# Altium PCB SD.PcbDoc
Units mm, origin at the board's own origin, x right, y up, seen from the top; angles counter-clockwise.
Board outline 23.37 x 34.8 mm, 2 copper layers (Top Layer, Bottom Layer); 9 components, 8 nets, 35 pads, 9 vias.
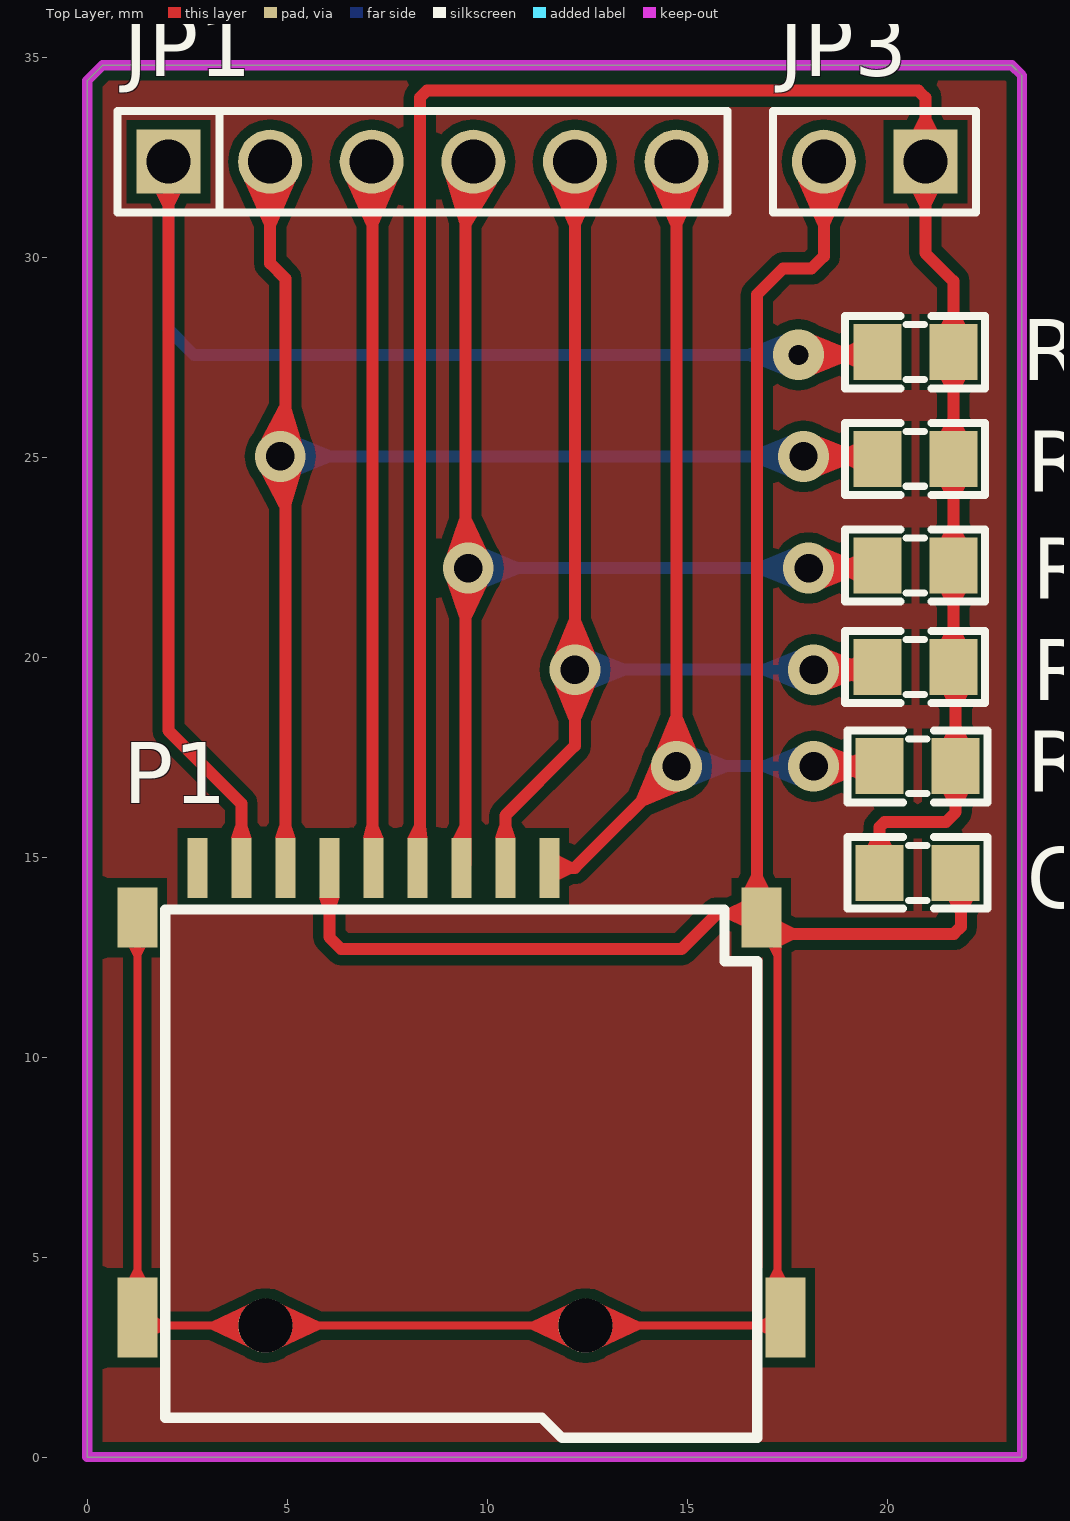
[diagram p0: Top Layer view]
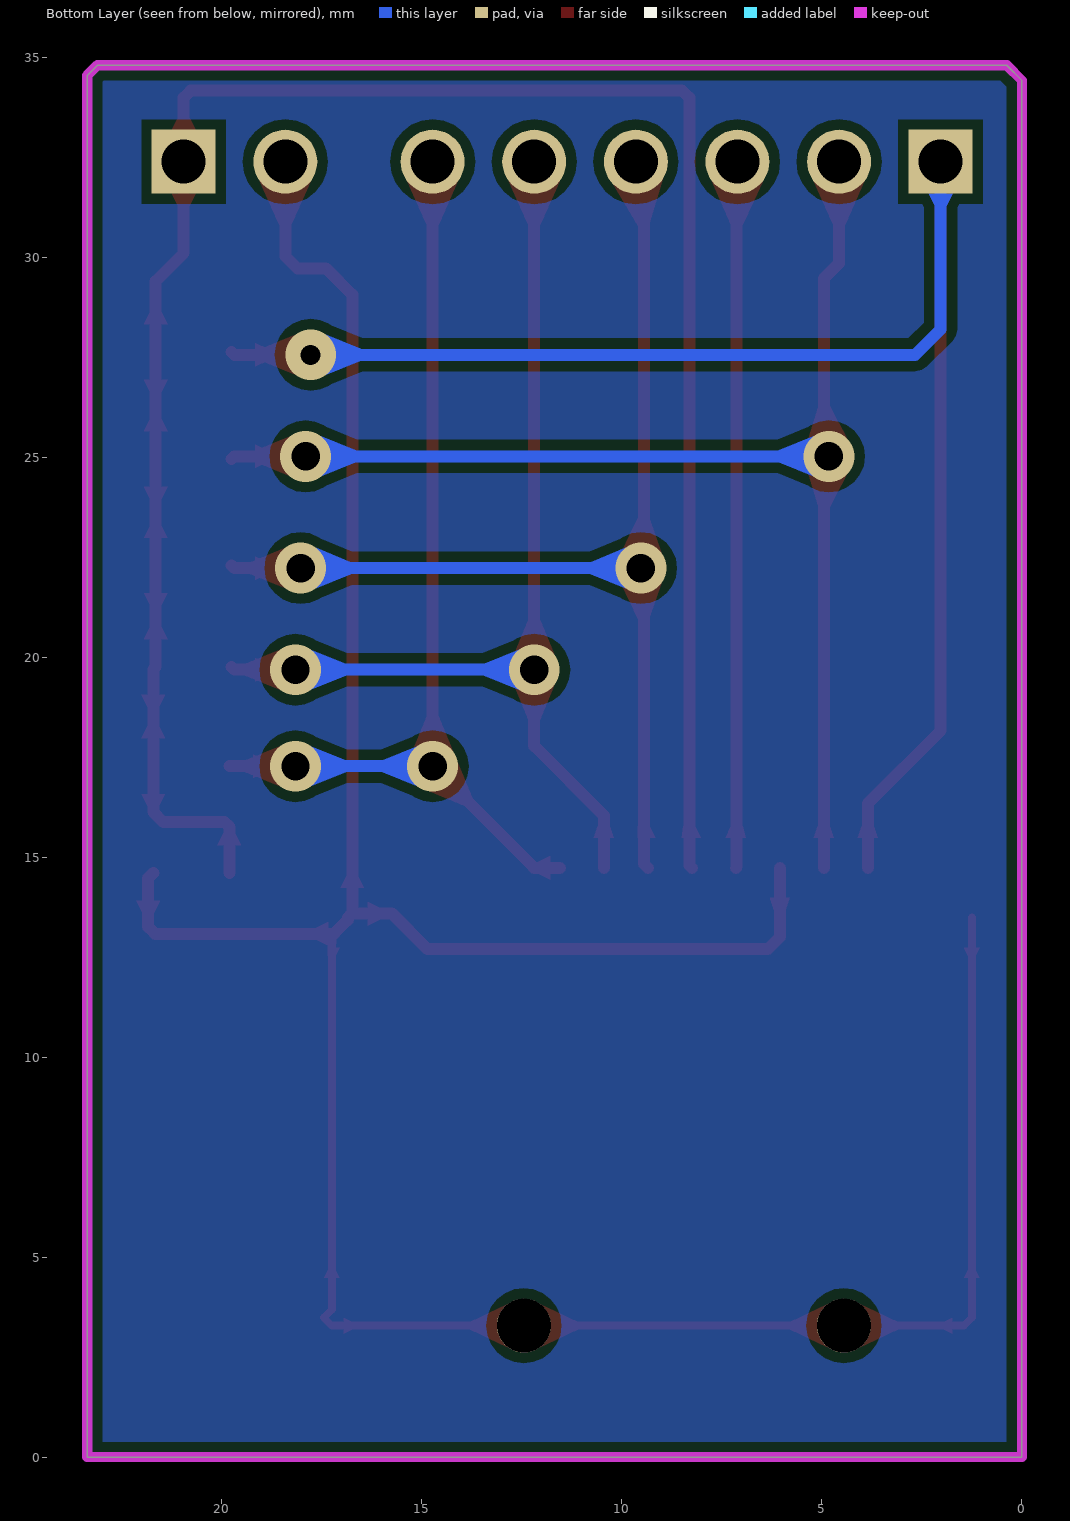
[diagram p1: Bottom Layer view, seen from below]
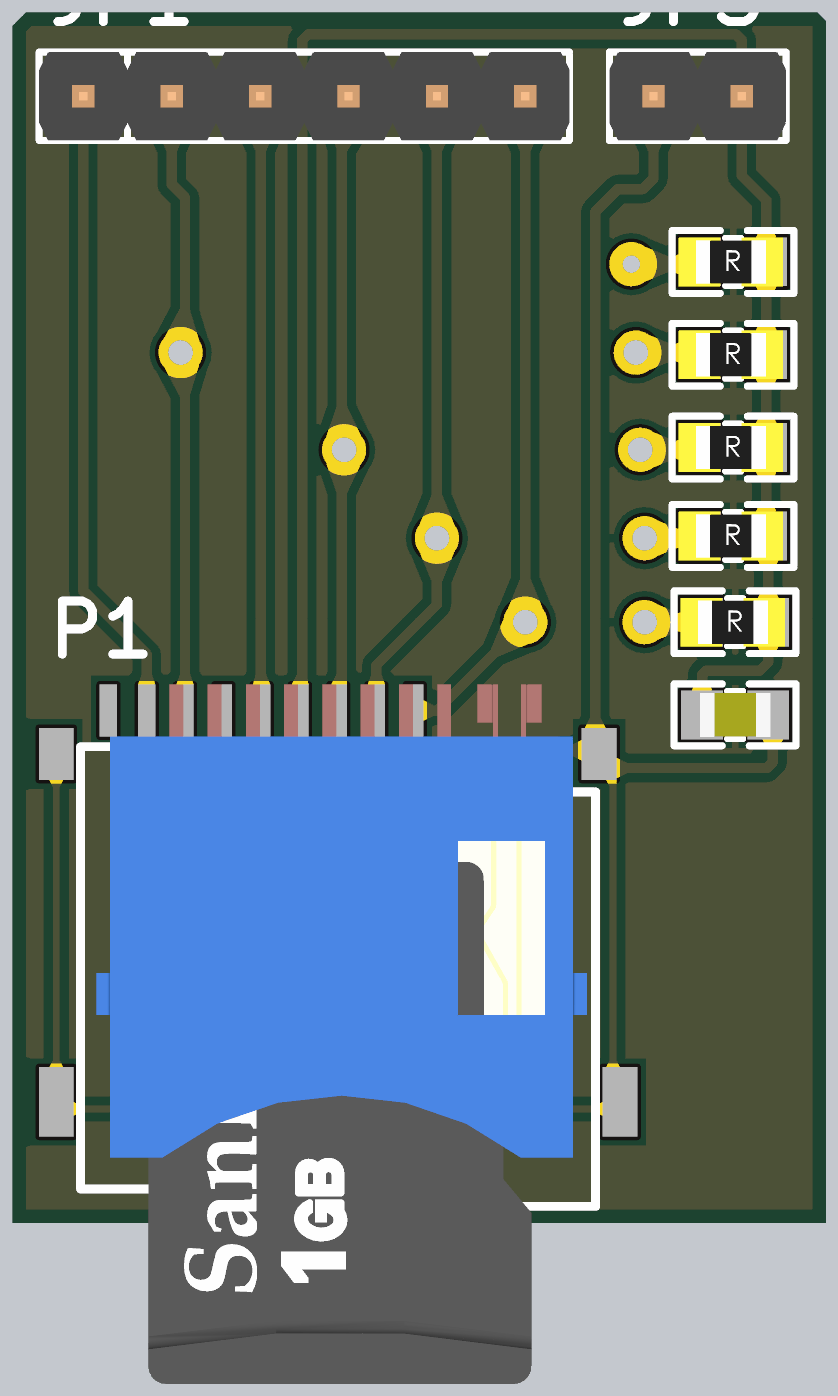
[diagram p2: 3D render of the assembled board from above, using the file's embedded part models]

## Layer stack, top to bottom
Top Solder: solder mask 0.0102, Solder Resist, Dk 3.5
Top Layer: signal copper 0.0356
Dielectric 1: dielectric 0.32, FR-4, Dk 4.8
Bottom Layer: signal copper 0.0356
Bottom Solder: solder mask 0.0102, Solder Resist, Dk 3.5

## Board outline
0,0 23.368,0 23.368,34.544 23.114,34.798 0.381,34.798 0,34.417

## Design rules (kind name [scope] priority, off if disabled: settings)
Clearance [All] p1: gap=0.254 ignorepadtopadclearanceinfootprint=FALSE except(0: Arc-Hole Track-Hole SMDPad-Hole THPad-Hole Via-Hole Fill-Hole Poly-Hole Region-Hole Text-Hole)
PolygonConnect [All] p1: connectstyle=Relief reliefconductorwidth=0.254 reliefentries=4 polygonreliefangle="90 Angle" airgapwidth=0.254
RoutingVias [All] p1: holewidth=0.711 width=1.27 viastyle="Through Hole" minholewidth=0.711 minwidth=1.27 maxholewidth=0.711 maxwidth=1.27
SolderMaskExpansion [All] p1: expansion=0.102
Width [All] p1: maxlimit=0.3 minlimit=0.15 preferedwidth=0.2
30 further rules are at their usual default settings.

## Components (designator, comment, footprint, x,y, rotation, side; value= is the part's Value field where it differs from the comment)
C1 "15pF" "tu 0805" 20.758,14.608 r0 top
JP1 "JP 1x6 2.54" "JP 1x6 DT" 2.032,32.385 r0 top
JP3 "JP 1x2 2.54" "JP 1x2 DT" 20.955,32.385 r180 top
P1 "Micro SD card" MicroSD 9.353,14.986 r0 top
R1 "2k" "tro smd 0805" 20.701,27.686 r0 top
R2 "2k" "tro smd 0805" 20.701,25.019 r0 top
R3 "2k" "tro smd 0805" 20.701,22.352 r0 top
R4 "2k" "tro smd 0805" 20.701,19.812 r0 top
R5 "2k" "tro smd 0805" 20.758,17.333 r0 top

## Footprints (in the part's own frame and the unit in brackets; to place one, negate y for a bottom-side part, rotate by r counter-clockwise, add the part's x,y. Pads: shape width x height; smd on the part's side, far side on the other; paste and mask are expansions set on the pad)
"JP 1x2 DT" [mm] "2 pins, 1 row, straight, gold plating"
  rect 1.6x1.6 hole 1.1: 1(0,0)
  round 1.6 hole 1.1: 2(2.54,0)
  silkscreen extent -1.27,-1.27 3.81,1.27, body extent -1.27,-1.27 3.81,1.27, height 8.54
"JP 1x6 DT" [mm] "6 pins, 1 row, straight, gold plating"
  rect 1.6x1.6 hole 1.1: 1(0,0)
  round 1.6 hole 1.1: 2(2.54,0) 3(5.08,0) 4(7.62,0) 5(10.16,0) 6(12.7,0)
  silkscreen extent -1.27,-1.27 13.97,1.27, body extent -1.27,-1.27 13.97,1.27, height 8.54
MicroSD [mm]
  rect 1x2 smd: 0(-8.1,-11.5) 0(8.1,-11.5)
  rect 1x1.5 smd: 0(-8.1,-1.5) 0(7.5,-1.5)
  round 1.35 hole 1.35: 0(-4.9,-11.7) 0(3.1,-11.7)
  rect 0.5x1.5 smd: 1(1.1,-0.254) 2(0,-0.254) 3(-6.6,-0.254) 4(-1.1,-0.254) 5(-2.2,-0.254) 6(-3.3,-0.254) 7(-4.4,-0.254) 8(-5.5,-0.254) 9(2.2,-0.254)
  silkscreen extent -7.4,-14.5 7.4,-1.3, body extent -6.95,-19.6 7.15,0.5, height 1.91
"tro smd 0805" [mm]
  rect 1.2x1.4 smd: 1(-0.946,-0.061) 2(0.954,-0.061)
  silkscreen extent -1.75,-0.97 1.75,0.84, body extent -1.56,-0.76 1.44,0.64, height 0.53
"tu 0805" [mm] "Compoment SMD 80x50mil"
  rect 1.2x1.4 smd: 1(-0.946,-0.003) 2(0.954,-0.003)
  silkscreen extent -1.75,-0.89 1.75,0.89, body extent -1.01,-0.64 1.01,0.63, height 0.61

## Part data
C1: library part "Tu 0805 15pF 50V 10%", "Dán", Chung_Loai=Dán, Don_Vi=Con, Ma_Hang=MH004556, So_Chan=2, Ten_Linh_Kien="T? 0805 15P 10% 50V"
JP1: library part "JP 1x6 2.54 Duc Thang", "C?m", Chung_Loai=C?m, Don_Vi=Con, Ma_Hang=MH000903, Ten_Linh_Kien="Jump Ðon Ð?c 2.54MM 1x40P Th?ng 11MM"
JP3: library part "JP 1x2 2.54 Duc Thang", "C?m", Chung_Loai=C?m, Don_Vi=Con, Ma_Hang=MH000903, Ten_Linh_Kien="Jump Ðon Ð?c 2.54MM 1x40P Th?ng 11MM"
R1 R2 R3 R4 R5: library part "Tro 0805 1% 2k", "Dán", Chung_Loai=Dán, Don_Vi=Con, Ma_Hang=MH005471, So_Chan=2, Ten_Linh_Kien="Tr? 0805 1% 2k"

## Via types
v1: diameter 1.27, hole 0.711, Top Layer to Bottom Layer, 8 vias
v2: diameter 1.27, hole 0.5, Top Layer to Bottom Layer, 1 vias

## Nets (pads, with @x,y where several pads share a name; then routed paths per layer and width w, separated by ;. In a path a pad name is that pad's centre, name@x,y a point inside that pad or via, vN(x,y) a via of type N, cw(c..) or ccw(c..) an arc to the next point about the centre after c; other vN are vias at no path point)
3.3V: C1.1 JP3.1 P1.4 R1.2 R2.2 R3.2 R4.2 R5.2 | length 53.4
  Top Layer w0.3: P1.4 8.316,14.795 8.316,33.987 8.492,34.163 20.779,34.163 20.955,33.987 JP3.1 20.955,30.099 21.655,29.399 R1.2 R2.2 R3.2 R4.2 21.712,19.695 R5.2 21.712,16.122 21.465,15.875 19.932,15.875 19.812,15.755 C1.1
CLK: JP1.3 P1.5 | length 17.7
  Top Layer w0.3: JP1.3 7.133,32.364 7.133,14.753 P1.5
CMD: JP1.4 P1.2 R3.1 | length 28
  Top Layer w0.3: P1.2 9.453,14.832 9.453,32.186 JP1.4 ; v1(18.034,22.225) 19.689,22.225 R3.1
  Bottom Layer w0.3: v1(9.525,22.225) v1(18.034,22.225)
D0: JP1.2 P1.7 R2.1 | length 32.8
  Top Layer w0.3: JP1.2 4.572,29.845 4.953,29.464 P1.7 ; v1(17.907,25.019) 19.695,25.019 R2.1
  Bottom Layer w0.3: v1(4.826,25.019) v1(17.907,25.019)
D1: JP1.1 P1.8 R1.1 | length 40.6
  Top Layer w0.3: JP1.1 2.032,18.161 3.853,16.34 P1.8 ; v2(17.78,27.559) 19.689,27.559 R1.1
  Bottom Layer w0.3: JP1.1 2.032,28.194 2.667,27.559 v2(17.78,27.559)
D2: JP1.6 P1.9 R5.1 | length 24.4
  Top Layer w0.3: P1.9 12.192,14.732 v1(14.732,17.272) JP1.6 ; v1(18.161,17.272) R5.1
  Bottom Layer w0.3: v1(14.732,17.272) v1(18.161,17.272)
D3: JP1.5 P1.1 R4.1 | length 26
  Top Layer w0.3: P1.1 10.453,16.041 12.192,17.78 v1(12.192,19.685) JP1.5 ; v1(18.161,19.685) 19.689,19.685 R4.1
  Bottom Layer w0.3: v1(12.192,19.685) v1(18.161,19.685)
GND: C1.2 JP3.2 P1.0 P1.6 | length 75.8
  Top Layer w0.2: P1.0@1.253,13.486 1.253,3.486 1.453,3.286 4.453,3.286 12.453,3.286 17.253,3.286 17.453,3.486 17.253,3.686 P1.0@17.253,13.081
  Top Layer w0.3: P1.6 6.053,12.997 6.35,12.7 14.859,12.7 15.748,13.589 16.75,13.589 P1.0@16.853,13.486 ; JP3.2 18.415,30.021 18.112,29.718 17.399,29.718 16.741,29.06 16.741,13.598 P1.0@16.853,13.486 ; C1.2 21.844,14.473 21.844,13.257 21.668,13.081 17.253,13.081 17.203,13.081 16.853,13.431 P1.0@16.853,13.486
pads on no net: P1.3

## Polygon pours and split planes (outlines as drawn)
no net on Bottom Layer (solid, pour order 0): 0,0 23.368,0 23.368,34.544 23.114,34.798 0.381,34.798 0,34.417
no net on Top Layer (solid, pour order 2): 0,0 23.368,0 23.368,34.544 23.114,34.798 0.381,34.798 0,34.417

## Keep-outs
Keep-Out Layer:
  lines w0.254: 0,0 0.508,0 23.368,0 23.368,34.544 23.114,34.798 0.381,34.798 0,34.417 0,0